# Altium PCB PCB1.PcbDoc
Units mil, origin at the board's own origin, x right, y up, seen from the top; angles counter-clockwise.
Board outline 6000 x 4000 mil, 2 copper layers (Top Layer, Bottom Layer); 37 components, 39 nets, 177 pads, 2 vias.
Unrouted connection lines stored in the file: 64.
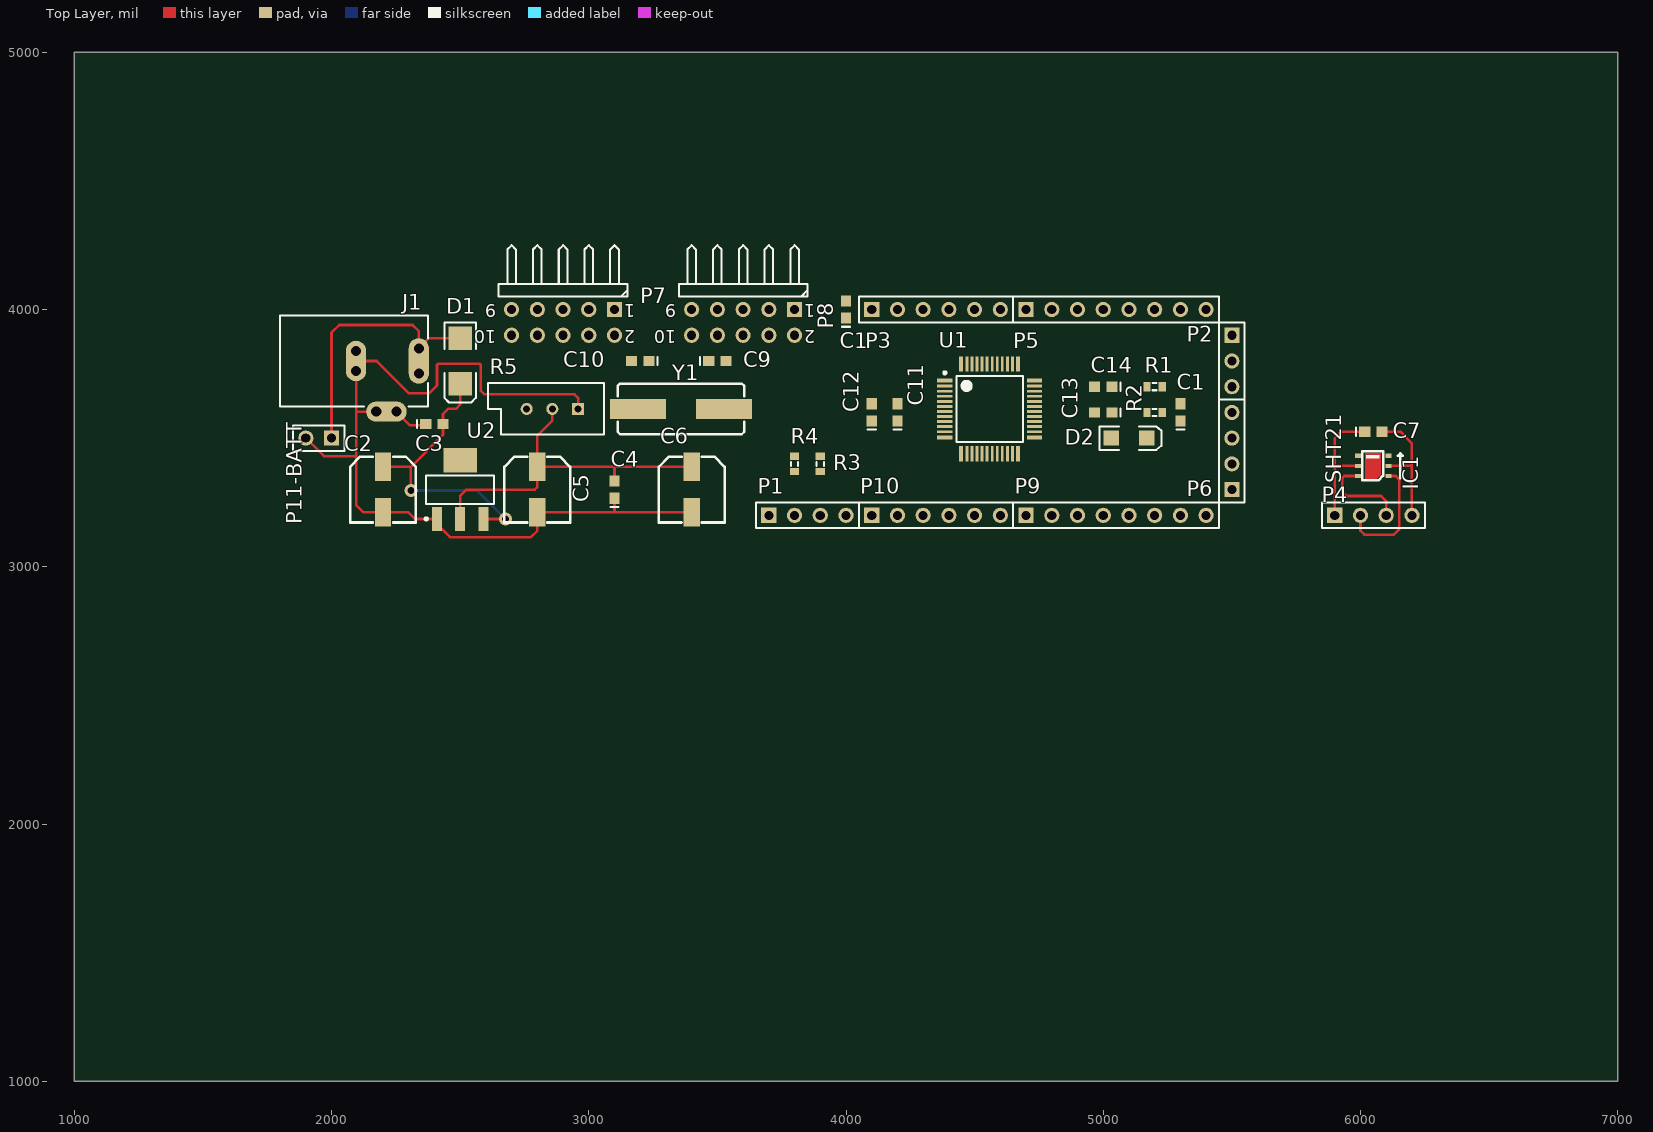
[diagram p0: Top Layer view]
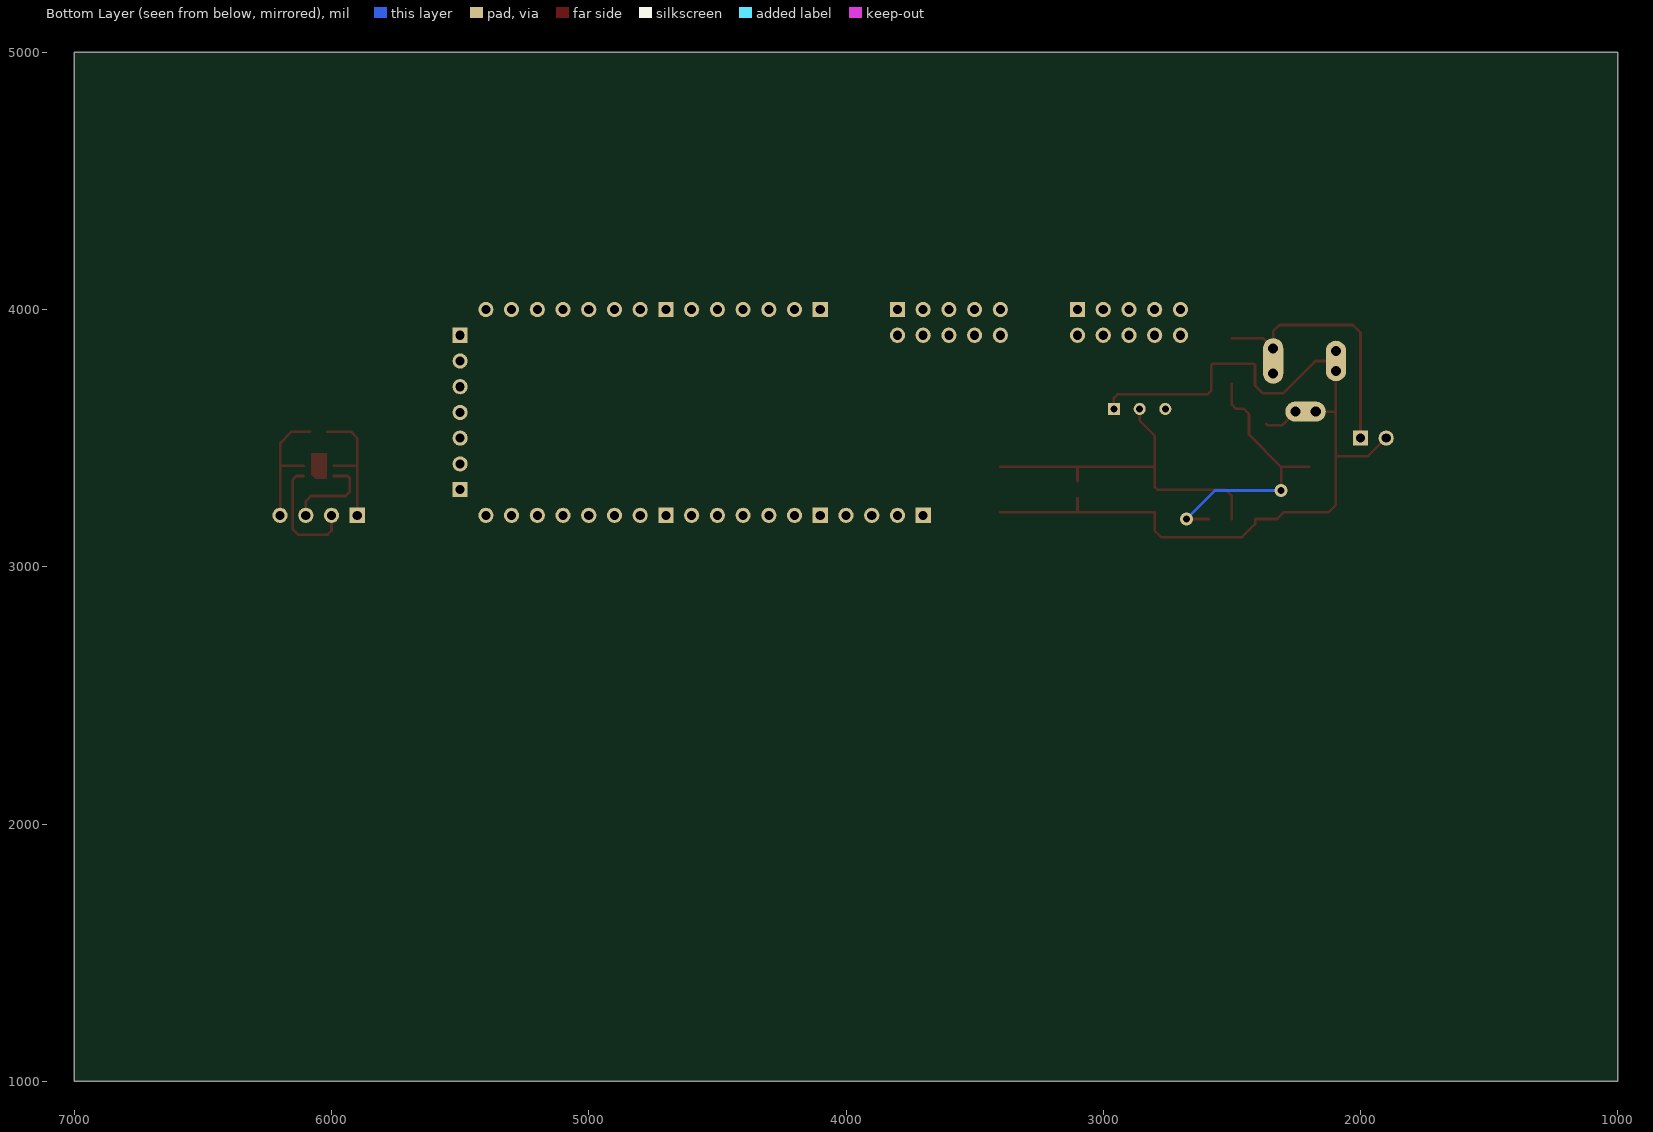
[diagram p1: Bottom Layer view, seen from below]

## Layer stack, top to bottom
Top Layer: signal copper 1.4
Dielectric: dielectric 12.6, FR-4, Dk 4.8
Bottom Layer: signal copper 1.4

## Board outline
1000,1000 7000,1000 7000,5000 1000,5000

## Design rules (kind name [scope] priority, off if disabled: settings)
Clearance [All] p1: gap=10
PolygonConnect [All] p1: connectstyle=Relief reliefconductorwidth=10 reliefentries=4 polygonreliefangle="90 Angle"
RoomDefinition SHT-BREAD [InComponentClass('SHT-BREAD')] p1: confinementstyle=ConfineIn formatcopy=TRUE lockcomponents=FALSE outline 5800,3100 6300,3100 6300,3600 5800,3600
RoomDefinition HIGROTERM [InComponentClass('HIGROTERM')] p2: confinementstyle=ConfineIn formatcopy=TRUE lockcomponents=FALSE outline 1800,3100 5600,3100 5600,4100 1800,4100
RoutingVias [All] p1: holewidth=28 width=50 viastyle="Through Hole" minholewidth=28 minwidth=50 maxholewidth=28 maxwidth=50
SilkscreenOverComponentPads [All] p1: minsilkscreentomaskgap=10
SolderMaskExpansion [All] p1: expansion=4
Width [All] p1: maxlimit=10 minlimit=10 preferedwidth=10
27 further rules are at their usual default settings.

## Classes and differential pairs
component class SHT-BREAD: C7 IC1 P4
component class HIGROTERM: C1 C2 C3 C4 C5 C6 C9 C10 C11 C12 C13 C14 D1 D2 J1 P1 P2 P3 P5 P6 P7 P8 P9 P10 P11-BATT R1 R2 R3 R4 R5 U1 U2 Y1

## Components (designator, comment, footprint, x,y, rotation, side; value= is the part's Value field where it differs from the comment)
C1 "C0603" 0603 4000,4000 r90 top
C1 "C0603" 0603 5300,3600 r90 top
C2 "EKE00BA210L00" PANASONIC-C-CAP 2200,3300 r0 top
C3 "C0603" 0603 2400,3555 r0 top
C4 "C0603" 0603 3100,3300 r90 top
C5 "EKE00BA210L00" PANASONIC-C-CAP 2800,3300 r0 top
C6 "EKE00BA210L00" PANASONIC-C-CAP 3400,3300 r0 top
C7 "C0603" 0603 6050,3525 r0 top
C9 "C0603" 0603 3500,3800 r0 top
C10 "C0603" 0603 3200,3800 r180 top
C11 "C0603" 0603 4200,3600 r90 top
C12 "C0603" 0603 4100,3600 r90 top
C13 "C0603" 0603 5000,3600 r180 top
C14 "C0603" 0603 5000,3700 r180 top
D1 "D Schottky" SMB 2500,3800 r270 top
D2 "LED2" 3.2X1.6X1.1 5100,3500 r0 top
IC1 "SHT21" PCBComponent_1 6050,3400 r0 top
J1 "PWR2.5" KLD-0202 1800,3800 r0 top
P1 "I2C" HDR1X4 3700,3200 r0 top
P2 "Header 3" HDR1X3 5500,3900 r270 top
P3 "USART" HDR1X6 4100,4000 r0 top
P4 "Header 4" HDR1X4 5900,3200 r0 top
P5 "Header 8" HDR1X8 4700,4000 r0 top
P6 "SPI" HDR1X4 5500,3300 r90 top
P7 "LCD_CONN" HDR2X5H 3100,4000 r180 top
P8 "JTAG" HDR2X5H 3800,4000 r180 top
P9 "Header 8" HDR1X8 4700,3200 r0 top
P10 "Header 6" HDR1X6 4100,3200 r0 top
P11-BATT "Header 2" HDR1X2 2000,3500 r180 top (schematic designator P11)
R1 "Res3" J1-0603 5200,3700 r180 top
R2 "Res3" J1-0603 5200,3600 r180 top
R3 "Res3" J1-0603 3900,3400 r90 top
R4 "Res3" J1-0603 3800,3400 r90 top
R5 "RPot" VR5 2858.46,3613.58 r180 top
U1 "LPC1114FBD48/302" SOT313-2_V 4558.46,3613.58 r0 top
U2 "LM1117MPX-3.3/NOPB" MP04A_N 2500,3300 r90 top
Y1 "XTAL" XTAL-HC497 3358.46,3613.58 r90 top

## Footprints (in the part's own frame and the unit in brackets; to place one, negate y for a bottom-side part, rotate by r counter-clockwise, add the part's x,y. Pads: shape width x height; smd on the part's side, far side on the other; paste and mask are expansions set on the pad)
3.2X1.6X1.1 [mm] "SMT LED; 2 Flat Leads"
  rect 1.5x1.5 smd: 1(-1.75,0) 2(1.75,0)
  silkscreen extent -2.9,-1.15 3.2,1.15
0603 [mm] "Chip Capacitor; Body 1.6 x 0.8 mm (LxW typ)"
  rect 1.1x1 smd: 1(-0.85,0) 2(0.85,0)
  silkscreen extent -1.7,-0.4 -1.7,0.4
HDR1X2 [mm] "Connector; Header; 2 Position"
  rect 1.5x1.5 hole 0.9: 1(0,0)
  round 1.5 hole 0.9: 2(2.54,0)
  silkscreen extent -1.27,-1.27 3.81,1.27
HDR1X3 [mm] "Connector; Header; 3 Position"
  rect 1.5x1.5 hole 0.9: 1(0,0)
  round 1.5 hole 0.9: 2(2.54,0) 3(5.08,0)
  silkscreen extent -1.27,-1.27 6.35,1.27
HDR1X4 [mm] "Connector; Header; 4 Position"
  rect 1.5x1.5 hole 0.9: 1(0,0)
  round 1.5 hole 0.9: 2(2.54,0) 3(5.08,0) 4(7.62,0)
  silkscreen extent -1.27,-1.27 8.89,1.27
HDR1X6 [mm] "Connector; Header; 6 Position"
  rect 1.5x1.5 hole 0.9: 1(0,0)
  round 1.5 hole 0.9: 2(2.54,0) 3(5.08,0) 4(7.62,0) 5(10.16,0) 6(12.7,0)
  silkscreen extent -1.27,-1.27 13.97,1.27
HDR1X8 [mm] "Connector; Header; 8 Position"
  rect 1.5x1.5 hole 0.9: 1(0,0)
  round 1.5 hole 0.9: 2(2.54,0) 3(5.08,0) 4(7.62,0) 5(10.16,0) 6(12.7,0) 7(15.24,0) 8(17.78,0)
  silkscreen extent -1.27,-1.27 19.05,1.27
HDR2X5H [mm] "Connector; Header; 5x2 Position; Right Angle"
  rect 1.5x1.5 hole 0.9: 1(0,0)
  round 1.5 hole 0.9: 2(0,2.54) 3(2.54,0) 4(2.54,2.54) 5(5.08,0) 6(5.08,2.54) 7(7.62,0) 8(7.62,2.54) 9(10.16,0) 10(10.16,2.54)
  silkscreen extent -1.27,-6.35 11.43,-1.27
J1-0603 [mm] "Chip Resistor, Body 1.6x0.8mm, IPC High Density"
  rect 0.7x0.9 smd: 1(-0.75,0) 2(0.75,0)
  silkscreen extent -0.2,-0.35 0.2,0.35, body extent -0.85,-0.48 0.85,0.48, height 0.9
KLD-0202 [mm] "DC Power Jack, 2.5mm, KLD Series, PCB Mount"
  oval 2x4.5 all layers, no hole: 1(13.7,0)
  round 1.5 hole 1: 1A(13.7,-1.25) 1B(13.7,1.25) 2A(7.5,-1) 2B(7.5,1) 3A(9.5,-5) 3B(11.5,-5)
  oval 2x4 all layers, no hole: 2(7.5,0)
  oval 4x2 all layers, no hole: 3(10.5,-5)
  silkscreen extent 0,-4.5 14.6,4.5
MP04A_N [mm] "SOT223, 4-Leads, Body 6.5x3.5mm, Pitch 2.3mm, Lead Span 7mm, IPC Medium Density"
  rect 2.4x1 smd: 1(-2.9,2.3) 2(-2.9,0) 3(-2.9,-2.3)
  rect 2.4x3.3 smd: 4(2.9,0)
  silkscreen extent -3.02,-3.35 1.4,3.47, body extent -1.86,-3.35 1.86,3.35, height 1.8
PANASONIC-C-CAP [mm]
  rect 1.6x2.8 smd: 1(0,2.25) 2(0,-2.25)
  silkscreen extent -3.25,-3.25 3.25,3.25
PCBComponent_1 [mm]
  rect 0.6x0.4 smd: 1(1.5,-1.2) 2(1.5,-0.2) 3(1.5,0.8) 4(-1.5,0.8) 5(-1.5,-0.2) 6(-1.5,-1.2)
  Top Layer region: -0.775,-1.463 0.35,-1.463 0.725,-1.088 0.725,1.037 -0.75,1.037 -0.775,1.062
  silkscreen extent -1.1,-1.62 2.9,1.25
SMB [mm] "DO-214-AA/SMB; 2 C-Bend Leads; Body 5.3 x 3.6 mm, inc. leads (LxW)"
  rect 2.3x2.3 smd: 1(-2.25,0) 2(2.25,0)
  silkscreen extent -3.8,-1.55 4.1,1.55
SOT313-2_V [mm] "Thin QFP, 48-Leads, Body 7x7mm, Pitch 0.5mm, NXP Recommended"
  rect 1.5x0.4 smd: 1(-4.425,2.81) 12(-4.425,-2.81) 25(4.425,-2.81) 36(4.425,2.81)
  rect 1.5x0.28 smd: 2(-4.425,2.25) 3(-4.425,1.75) 4(-4.425,1.25) 5(-4.425,0.75) 6(-4.425,0.25) 7(-4.425,-0.25) 8(-4.425,-0.75) 9(-4.425,-1.25) 10(-4.425,-1.75) 11(-4.425,-2.25) 26(4.425,-2.25) 27(4.425,-1.75) 28(4.425,-1.25) 29(4.425,-0.75) 30(4.425,-0.25) 31(4.425,0.25) 32(4.425,0.75) 33(4.425,1.25) 34(4.425,1.75) 35(4.425,2.25)
  rect 0.4x1.5 smd: 13(-2.81,-4.425) 24(2.81,-4.425) 37(2.81,4.425) 48(-2.81,4.425)
  rect 0.28x1.5 smd: 14(-2.25,-4.425) 15(-1.75,-4.425) 16(-1.25,-4.425) 17(-0.75,-4.425) 18(-0.25,-4.425) 19(0.25,-4.425) 20(0.75,-4.425) 21(1.25,-4.425) 22(1.75,-4.425) 23(2.25,-4.425) 38(2.25,4.425) 39(1.75,4.425) 40(1.25,4.425) 41(0.75,4.425) 42(0.25,4.425) 43(-0.25,4.425) 44(-0.75,4.425) 45(-1.25,4.425) 46(-1.75,4.425) 47(-2.25,4.425)
  silkscreen extent -4.55,-3.27 3.28,3.68, body extent -3.5,-3.5 3.5,3.5, height 1.6
VR5 [mm] "Thru-Hole; 3 Leads"
  rect 1.2x1.2 hole 0.7: 1(-2.54,0)
  round 1.2 hole 0.7: 2(0,0) 3(2.54,0)
  silkscreen extent -5.08,-2.54 6.35,2.54
XTAL-HC497 [mm]
  rect 2x5.5 smd: 1(0,4.25) 2(0,-4.25)
  silkscreen extent -2.5,-6.25 2.5,6.25

## Part data
C1 C1 C3 C4 C7 C9 C10 C11 C12 C13 C14: "Ceramic Chip Capacitor - Standard"
C2 C5 C6: "Aluminum Electrolytic Capacitor, Radial Style with Long Leads: 10uF, 100V"
D1: "Schottky Diode"
D2: "Typical RED, GREEN, YELLOW, AMBER GaAs LED"
J1: "Low Voltage Power Supply Connector"
P1 P6: library part "Header 4", "Header, 4-Pin"
P2: "Header, 3-Pin"
P3: library part "Header 6", "Header, 6-Pin"
P4: "Header, 4-Pin"
P5 P9: "Header, 8-Pin"
P7 P8: library part "Header 5X2H", "Header, 5-Pin, Dual row, Right Angle"
P10: "Header, 6-Pin"
P11-BATT: "Header, 2-Pin"
R1 R2 R3 R4: "Resistor"
R5: "Potentiometer"
U1: "32-bit ARM Cortex-M0 MCU, LPC1100L Series, 32 kB Flash, 8 kB SRAM, 2 SPI, ADC, 48-Pin LQFP"
U2: "800mA Low-Dropout Linear Regulator, 4-pin SOT-223, Pb-Free"
Y1: "Crystal Oscillator"

## Via types
v1: diameter 50, hole 28, Top Layer to Bottom Layer, 2 vias

## Nets (pads, with @x,y where several pads share a name; then routed paths per layer and width w, separated by ;. In a path a pad name is that pad's centre, name@x,y a point inside that pad or via, vN(x,y) a via of type N, cw(c..) or ccw(c..) an arc to the next point about the centre after c; other vN are vias at no path point)
AD0: U1.32
AD1: U1.33
AD2: U1.34
AD3: U1.35
AD4: P8.2 U1.39
AD5: U1.40
AD6: U1.30
AD7: D2.2 U1.42
CTS: P3.5 U1.23
DB4: P7.7 U1.17
DB5: P7.8 U1.13
DB6: P7.9 U1.26
DB7: P7.10 U1.38
DTR: P3.1 U1.2
E: P7.6 U1.9
GND: C1.2@4000,4033.46 C2.2 C3.1 C4.1 C5.2 C6.2 C9.1 C10.1 C11.1 C12.1 C13.1 C14.1 J1.2 J1.2A J1.2B J1.3 J1.3A J1.3B P1.4 P3.6 P7.1 P8.3 P8.5 P8.9 P11-BATT.2 R2.1 R5.1 U1.5 U1.41 U2.1 | length 3631.2
  Top Layer w10: P11-BATT.2 1970,3430 2095.28,3430 ; J1.2A 2095.28,3430 ; J1.2 2175,3800 2300,3675 2380,3675 2410,3705 2410,3785 2415,3790 2575,3790 2580,3785 2580,3685.28 2595.28,3670 2945,3670 2958.46,3656.54 R5.1 ; 2097.13,3603.15 J1.3A ; J1.3B 2305.91,3550 2361.54,3550 C3.1 ; 3100,3211.42 C4.1 ; C6.2 C5.2 2800,3140 2775,3115 2460,3115 2409.45,3165.55 U2.1 2324.17,3185.83 2298.58,3211.42 C2.2 2123.58,3211.42 2095.28,3239.72 2095.28,3430
ISP: P2.1 R1.1 U1.4
MISO: P6.3 U1.27
MOSI: P6.4 P8.6 U1.28
NetC2_1: C2.1 C3.2 D1.2 U2.3 | length 1118.8
  Top Layer w10: C2.1 2308.58,3388.58 ; v1(2308.58,3296.42) 2308.58,3388.58 ; D1.2 2500,3630 2485,3615 2455,3615 2433.46,3593.46 C3.2 2433.46,3513.46 2308.58,3388.58 ; U2.3 v1(2675.83,3185.83)
  Bottom Layer w10: v1(2308.58,3296.42) 2565.23,3296.42 v1(2675.83,3185.83)
NetC7_1: C7.1 IC1.5 P4.1 | length 519
  Top Layer w10: P4.1 5900,3395 ; IC1.5 5902.87,3392.13 5900,3395 ; C7.1 5925,3525 5900,3500 5900,3395
NetC7_2: C7.2 IC1.2 P4.4 | length 503.2
  Top Layer w10: C7.2 6155,3525 6200,3480 P4.4 ; IC1.2 6197.13,3392.13
NetC9_2: C9.2 U1.6 Y1.2
NetC10_2: C10.2 U1.7 Y1.1
NetD1_1: D1.1 J1.1 J1.1A J1.1B P11-BATT.1 | length 1015.2
  Top Layer w10: P11-BATT.1 2000,3910 2030,3940 2315,3940 2339.37,3915.63 J1.1B 2378.74,3888.58 D1.1
NetIC1_1: IC1.1 P4.2 | length 465.7
  Top Layer w10: P4.2 6000,3140 6015,3125 6130,3125 6150,3145 6150,3340 6137.24,3352.76 IC1.1
NetIC1_6: IC1.6 P4.3 | length 358.7
  Top Layer w10: IC1.6 5937.76,3352.76 5930,3345 5930,3290 5945,3275 6080,3275 6100,3255 P4.3
NetP2_2: P2.2 R2.2
NetP7_3: P7.3 R5.3
R/W: P7.5 P8.4 U1.29
RESET: C1.1@4000,3966.54 C4.2 C5.1 C6.1 C11.2 C12.2 C13.2 C14.2 D2.1 P1.1 P7.2 P8.1 P8.10 R1.2 R3.2 R4.2 R5.2 U1.3 U1.8 U1.44 U2.2 | length 1386.6
  Top Layer w10: U2.2 2500,3275 2525,3300 2790,3300 2800,3310 C5.1 ; R5.2 2858.46,3568.46 2800,3510 C5.1 ; C4.2 3100,3388.58 ; C6.1 3100,3388.58 ; C5.1 3100,3388.58
RS: P7.4 U1.14
RTS: P3.4 U1.45
RXD: P3.3 U1.46
SCK0: P6.2 U1.22
SCL: P1.3 R3.1 U1.15
SDA: P1.2 R4.1 U1.16
SSEL0: P6.1 U1.10
TXD: P3.2 U1.47
pads on no net: C1.1@5300,3566.54 C1.2@5300,3633.46 IC1.3 IC1.4 P2.3 P5.1 P5.2 P5.3 P5.4 P5.5 P5.6 P5.7 P5.8 P8.7 P8.8 P9.1 P9.2 P9.3 P9.4 P9.5 P9.6 P9.7 P9.8 P10.1 P10.2 P10.3 P10.4 P10.5 P10.6 U1.1 U1.11 U1.12 U1.18 U1.19 U1.20 U1.21 U1.24 U1.25 U1.31 U1.36 U1.37 U1.43 U1.48 U2.4

## Text inside footprints (layer, text, board x,y; h text height)
J1: Mechanical 1 "Mech 2 - Clearance, move to internal plane if present" at 1811.26,3999.44 h11.81; Mechanical 1 "Mech 1 - Slot cut-out" at 1811.26,4019.13 h11.81; Mechanical 1 "Assign keep-out area to slot" at 1811.26,4058.5 h11.81; Mechanical 1 "Alert PCB fab to slot details" at 1811.26,4038.82 h11.81
P7: Top Overlay "10" at 2640,3920 h50 r180; Top Overlay "9" at 2640,4020 h50 r180; Top Overlay "1" at 3180,4020 h50 r180; Top Overlay "2" at 3180,3920 h50 r180
P8: Top Overlay "10" at 3340,3920 h50 r180; Top Overlay "9" at 3340,4020 h50 r180; Top Overlay "1" at 3880,4020 h50 r180; Top Overlay "2" at 3880,3920 h50 r180